# Altium PCB PCB_wordclocksmall_2023-02-03.pcbdoc (part 3 of 4)
Units mm, origin at the board's own origin, x right, y up, seen from the top; angles counter-clockwise.
Board outline 275.21 x 268.14 mm, 2 copper layers (Top Layer, Bottom Layer); 355 components, 229 nets, 1166 pads, 399 vias.
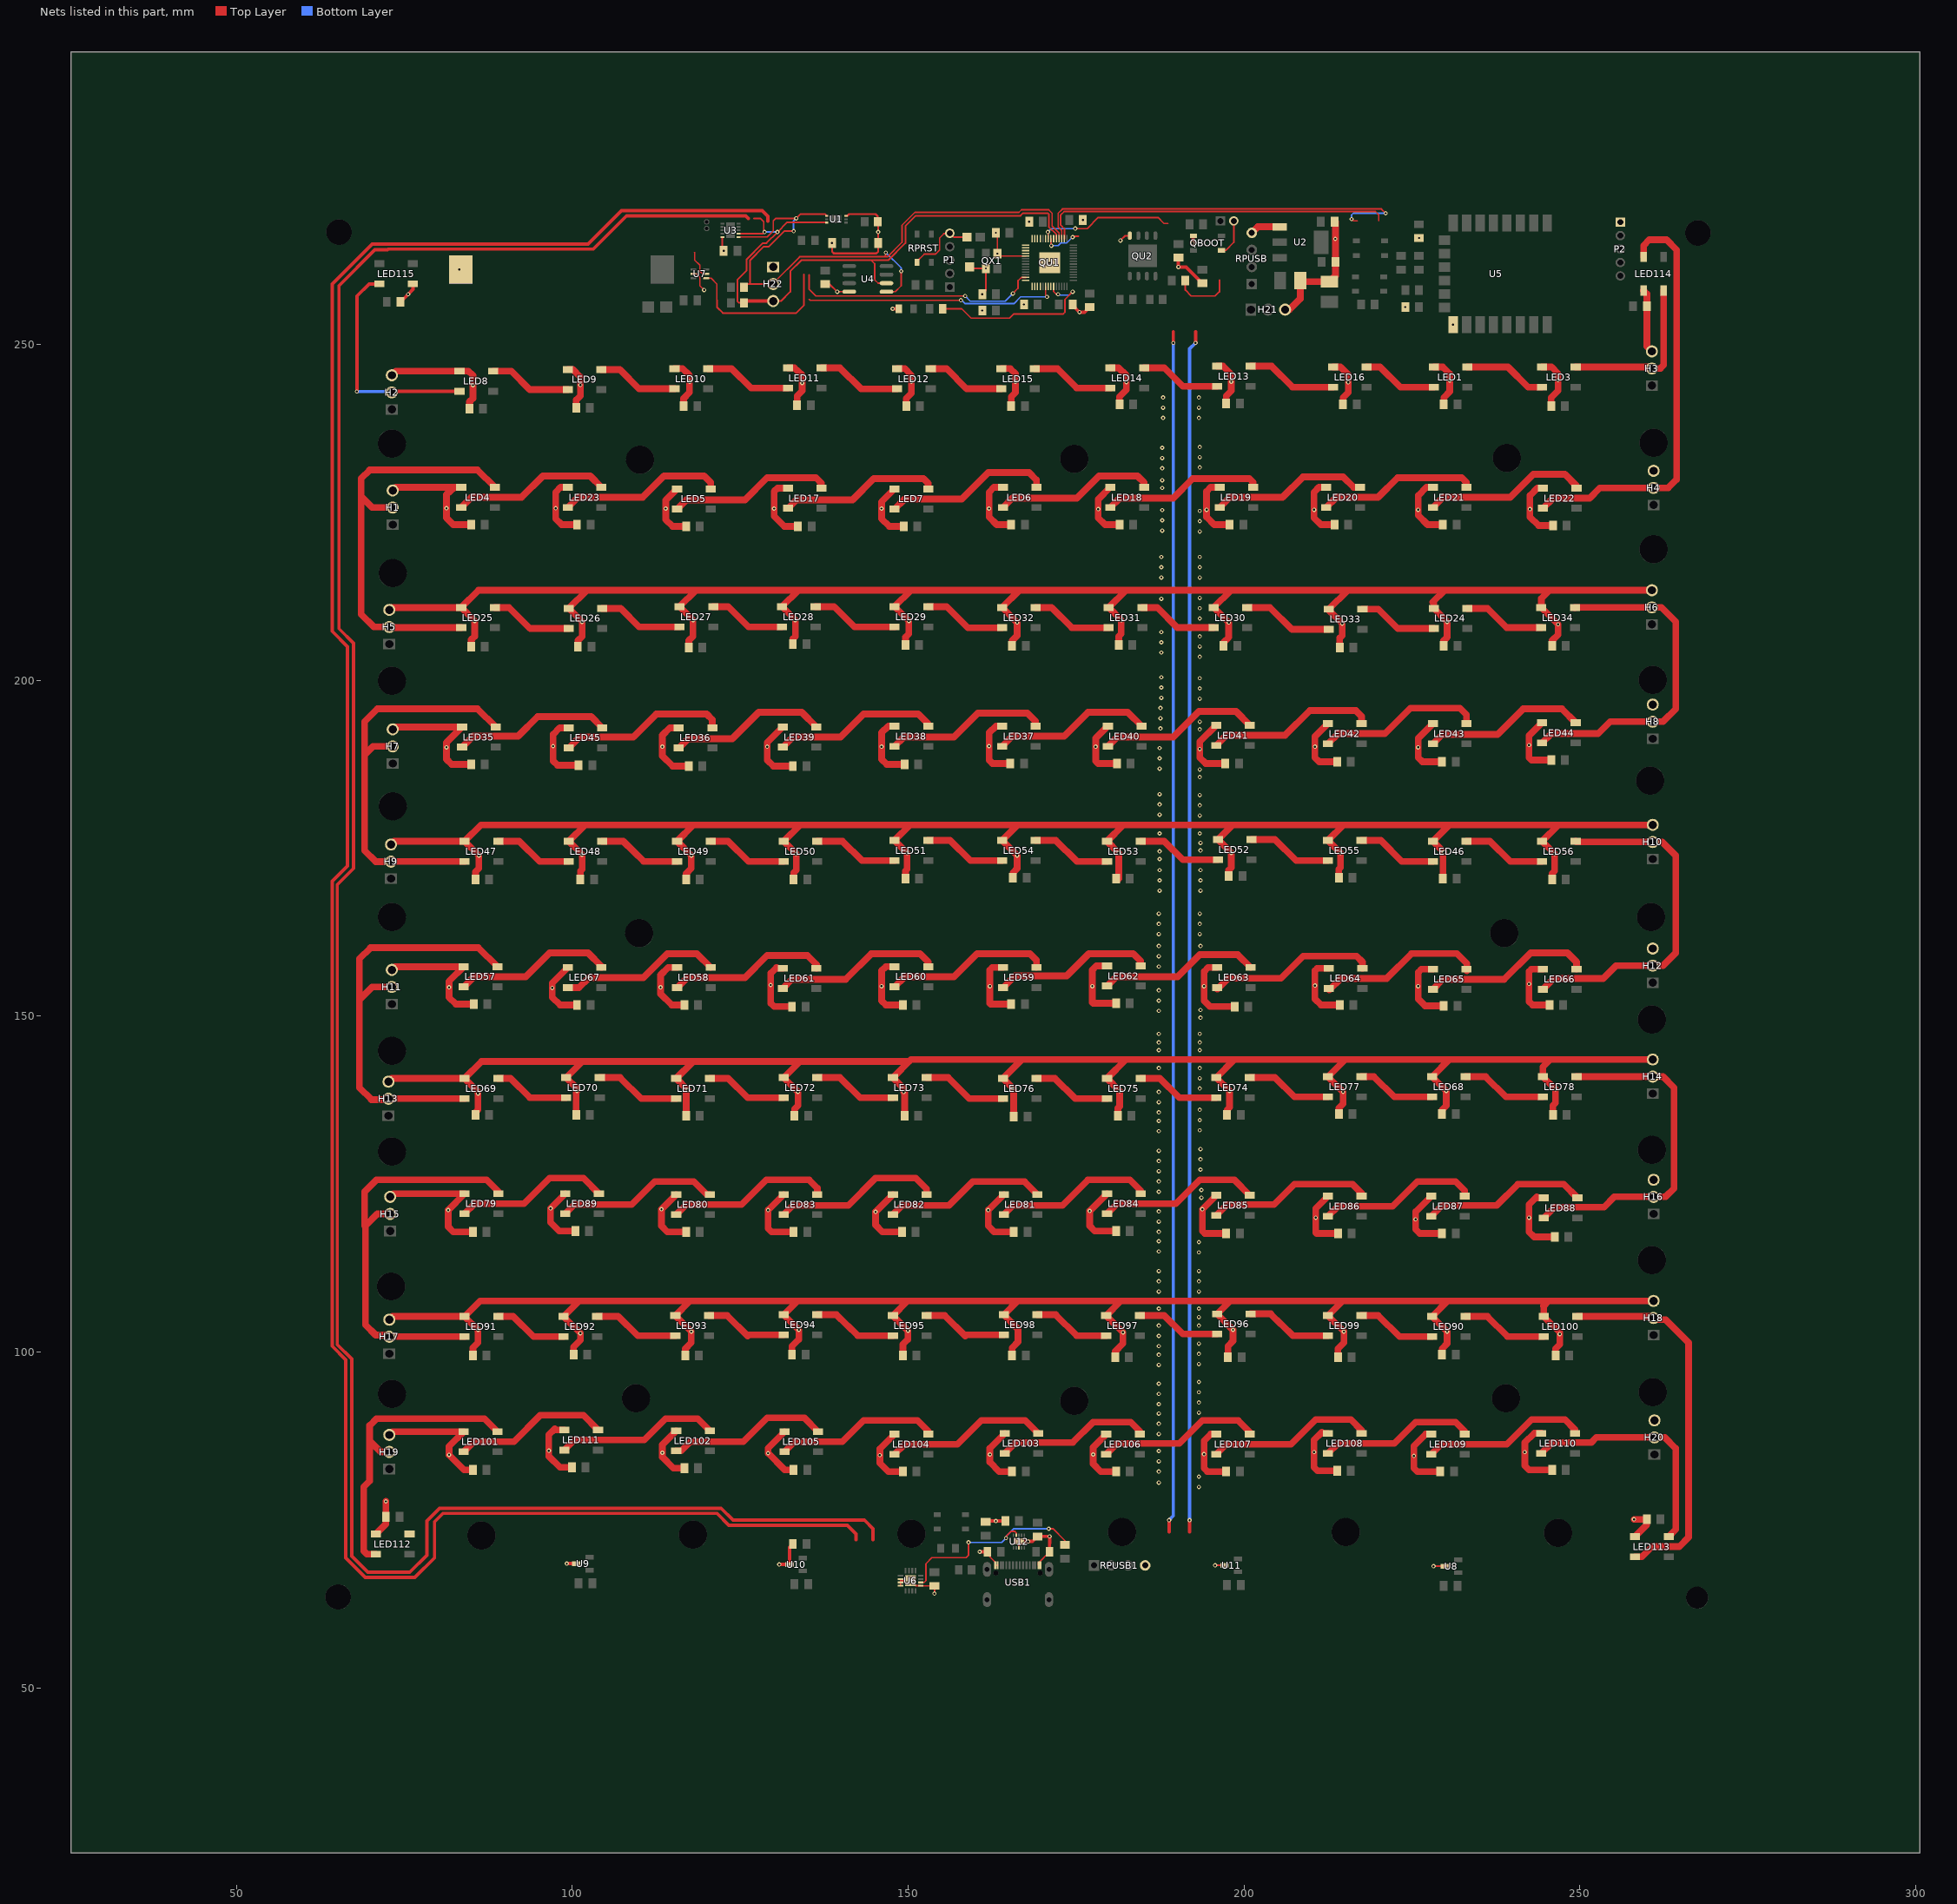
[diagram p3: the nets of this part, all layers, seen from the top]

## Via types
v1: diameter 0.635, hole 0.305, Top Layer to Bottom Layer, tented both sides, 361 vias
v2: diameter 0.61, hole 0.305, Top Layer to Bottom Layer, tented both sides, 37 vias
v3: diameter 1, hole 0.5, Top Layer to Bottom Layer, tented both sides, 1 vias

## Nets (pads, with @x,y where several pads share a name; then routed paths per layer and width w, separated by ;. In a path a pad name is that pad's centre, name@x,y a point inside that pad or via, vN(x,y) a via of type N, cw(c..) or ccw(c..) an arc to the next point about the centre after c; other vN are vias at no path point) (continued)
GND: BT1.2 BT2.2 C1.2 C2.1 C3.2 C4.2 C5.2 C6.1 C7.2 C8.2 C9.2 C10.1 C11.2 C12.2 C13.2 C14.2 C15.2 C16.2 C17.2 C18.2 C19.2 C20.2 C21.2 C22.2 C23.2 C24.2 C25.2 C26.2 C27.2 C28.2 C29.2 C30.2 C31.2 C32.2 C33.2 C34.2 C35.2 C36.2 C37.2 C38.2 C39.2 C40.2 C41.2 C42.2 C43.2 C44.2 C45.2 C46.2 C47.2 C48.2 C49.2 C50.2 C51.2 C52.2 C53.2 C54.2 C55.2 C56.2 C57.2 C58.2 C59.2 C60.2 C61.2 C62.2 C63.2 C64.2 C65.2 C66.2 C67.2 C68.2 C69.2 C70.2 C71.2 C72.2 C73.2 C74.2 C75.2 C76.2 C77.2 C78.2 C79.2 C80.2 C81.2 C82.2 C83.2 C84.2 C85.2 C86.2 C87.2 C88.2 C89.2 C90.2 C91.2 C92.2 C93.2 C94.2 C95.2 C96.2 C97.2 C98.2 C99.2 C100.2 C101.2 C102.2 C103.2 C104.2 C105.2 C106.2 C107.2 C108.2 C109.2 C110.2 C111.2 C112.2 C113.2 C114.2 C115.2 C116.2 C117.2 C118.2 C119.2 C120.2 C121.2 C122.2 C123.2 C124.2 C125.1 C126.1 C127.1 C128.1 C129.2 C130.2 C131.1 C132.1 C133.1 C134.2 C135.1 C136.2 C137.2 C138.2 C139.1 H1.3 H2.3 H3.3 H4.3 H5.3 H6.3 H7.3 H8.3 H9.3 H10.3 H11.3 H12.3 H13.3 H14.3 H15.3 H16.3 H17.3 H18.3 H19.3 H20.3 H21.3 H22.1 LED1.3 LED3.3 LED4.3 LED5.3 LED6.3 LED7.3 LED8.3 LED9.3 LED10.3 LED11.3 LED12.3 LED13.3 LED14.3 LED15.3 LED16.3 LED17.3 LED18.3 LED19.3 LED20.3 LED21.3 LED22.3 LED23.3 LED24.3 LED25.3 LED26.3 LED27.3 LED28.3 LED29.3 LED30.3 LED31.3 LED32.3 LED33.3 LED34.3 LED35.3 LED36.3 LED37.3 LED38.3 LED39.3 LED40.3 LED41.3 LED42.3 LED43.3 LED44.3 LED45.3 LED46.3 LED47.3 LED48.3 LED49.3 LED50.3 LED51.3 LED52.3 LED53.3 LED54.3 LED55.3 LED56.3 LED57.3 LED58.3 LED59.3 LED60.3 LED61.3 LED62.3 LED63.3 LED64.3 LED65.3 LED66.3 LED67.3 LED68.3 LED69.3 LED70.3 LED71.3 LED72.3 LED73.3 LED74.3 LED75.3 LED76.3 LED77.3 LED78.3 LED79.3 LED80.3 LED81.3 LED82.3 LED83.3 LED84.3 LED85.3 LED86.3 LED87.3 LED88.3 LED89.3 LED90.3 LED91.3 LED92.3 LED93.3 LED94.3 LED95.3 LED96.3 LED97.3 LED98.3 LED99.3 LED100.3 LED101.3 LED102.3 LED103.3 LED104.3 LED105.3 LED106.3 LED107.3 LED108.3 LED109.3 LED110.3 LED111.3 LED112.3 LED113.3 LED114.3 LED115.3 LED116.1 P1.5 P2.1 QBOOT.4 QU1.19 QU1.57 QU2.4 QX1.2 QX1.4 R1.2 R16.1 R17.1 R19.1 R23.1 RPRST.4 RPUSB1.4 RPUSB.4 U1.3 U2.1 U3.5 U4.4 U5.9 U6.2 U6.3 U6.4 U6.9 U6.17 U7.2 U8.3 U9.3 U10.3 U11.3 U12.8 U12.11 USB1.A1 USB1.A12 USB1.B1 USB1.B12 | length 2030.9
  Top Layer w0.229: U7.2@118.054,260.522 118.491,260.522 118.999,260.014 118.999,258.744 v1(119.634,258.109) ; v1(139.446,257.855) U4.4@141.245,257.855 ; U6.4@148.868,65.209 U6.3@148.868,65.709 U6.2@148.868,66.207 ; RPRST.4@151.325,262.232 151.325,262.368 152.4,263.443 154.051,263.443 154.686,264.078 154.686,265.856 155.321,266.491 156.147,266.491 P1.5@156.21,266.554 ; v1(161.036,257.474) 161.583,258.021 v1(161.583,261.327) ; R17.1@161.814,70.276 161.813,69.88 162.97,68.723 USB1.A1@162.97,68.257 USB1.B12@163.32,68.257 ; v1(163.068,266.618) 163.283,266.403 v1(163.283,263.527) 163.637,263.173 QU1.19@167.519,263.173 ; U12.8@166.497,70.872 U12.11@166.497,71.8 ; USB1.A12@169.72,68.257 USB1.B1@169.42,68.257 169.42,68.643 R19.1@171.053,70.276
  Top Layer w0.254: U3.5@122.354,265.999 122.354,264.152 v2(122.555,263.951) ; C136.2@137.668,258.998 138.303,258.998 v1(139.446,257.855) ; U6.3@148.868,65.709 149.117,65.958 U6.17@150.368,65.958 151.117,65.209 U6.9@151.868,65.209 ; U6.9@151.868,65.209 C139.1@153.924,65.196 v1(153.924,64.053) ; P1.5@156.21,266.554 156.781,265.983 C135.1@158.766,265.983 ; C134.2@159.131,261.554 159.358,261.327 v1(161.583,261.327) ; v1(181.61,265.475) 182.336,266.201 QU2.4@183.007,266.202 ; v1(195.707,68.244) U11.3@197.12,68.244 ; v1(228.219,68.117) U8.3@229.886,68.117
  Top Layer w0.3: v1(138.684,265.094) 138.684,263.824 138.938,263.57 145.288,263.57 145.542,263.824 C7.2@145.542,265.094 v1(145.542,266.745) 145.542,268.219 R1.2@145.492,268.269 ; U1.3@140.746,269.15 140.962,269.15 141.224,269.412 145.161,269.412 145.491,269.082 R1.2@145.492,268.269
  Top Layer w0.508: C122.2@74.422,256.331 v1(75.57,257.479) 76.287,258.196 LED115.3@76.287,259.022 ; v1(99.187,68.498) U9.3@100.6,68.498 ; v1(130.821,68.381) U10.3@132.35,68.371 ; U10.3@132.35,68.371 132.35,70.927 C4.2@132.842,71.419 ; v1(147.701,255.315) LED116.1@148.633,255.315 ; v1(160.655,70.276) R17.1@161.814,70.276 ; C137.2@161.544,74.721 161.671,74.848 v1(163.068,74.848) R23.1@164.465,74.848 ; U12.11@166.497,71.8 v1(167.876,71.8) 168.529,71.8 C138.2@169.291,72.562 v1(171.069,72.562) R19.1@171.053,70.276 ; C133.1@174.498,255.95 174.498,255.823 v1(175.514,254.807) 176.276,254.807 C124.2@177.038,255.569 ; C129.2@190.246,262.935 v1(190.246,261.538) 191.389,261.538 C131.1@193.802,259.125 ; v2(192.405,265.094) 192.405,266.11 QBOOT.4@192.464,266.169
  Top Layer w0.991: H2.3@73.152,245.409 73.763,246.02 LED8.3@83.225,246.02 ; LED8.3@83.226,246.021 84.557,246.021 85.217,245.409 v1(85.217,243.942) 85.217,241.98 84.709,241.472 C16.2@84.709,240.456 ; LED9.3@99.355,246.275 100.099,246.275 101.219,245.155 v1(101.219,243.968) 101.219,242.361 100.584,241.726 C17.2@100.584,240.583 ; LED10.3@115.23,246.402 116.434,246.402 117.475,245.409 v1(117.475,244.425) 117.475,242.869 116.586,241.98 C18.2@116.586,240.837 ; LED11.3@132.121,246.529 133.071,246.529 134.239,245.409 v1(134.239,244.247) 134.239,243.123 133.477,242.361 C19.2@133.477,240.964 ; LED12.3@148.376,246.401 149.503,246.401 150.495,245.409 v1(150.495,244.476) 150.495,242.742 149.733,241.98 C20.2@149.733,240.837 ; LED15.3@163.871,246.402 165.202,246.402 165.989,245.663 v1(165.989,244.45) 165.989,242.869 165.354,242.234 C23.2@165.354,240.837 ; LED14.3@180.127,246.529 181.331,246.529 182.499,245.409 v1(182.499,244.4) 182.499,243.25 181.483,242.234 C22.2@181.483,241.091 ; LED13.3@196.001,246.782 196.874,246.782 198.12,245.536 v1(198.12,244.45) 198.12,243.123 197.358,242.361 C21.2@197.358,241.218 ; LED16.3@213.274,246.656 214.351,246.656 215.519,245.536 v1(215.519,244.374) 215.519,242.869 214.757,242.107 C5.2@214.757,241.091 ; LED1.3@228.26,246.656 229.591,246.656 230.632,245.663 v1(230.632,244.654) 230.632,242.996 229.743,242.107 C11.2@229.743,241.091 ; LED3.3@244.388,246.655 245.769,246.655 246.761,245.663 v1(246.761,244.704) 246.761,243.123 245.745,242.107 C1.2@245.745,240.837
  Top Layer w1: LED112.3@70.779,72.919 72.263,74.403 C119.2@72.263,75.483 v1(72.263,77.769) ; H13.3@72.644,140.253 73.128,140.737 LED69.3@83.987,140.737 ; H19.3@72.771,87.675 73.255,88.159 LED101.3@83.86,88.159 81.661,85.96 v1(81.661,84.701) 83.894,82.468 C108.2@85.217,82.468 ; H17.3@72.771,104.82 73.255,105.304 LED91.3@83.987,105.304 ; H5.3@72.771,210.484 73.128,210.841 LED25.3@83.479,210.841 ; H15.3@72.898,123.108 73.382,123.592 LED79.3@83.987,123.592 v1(81.534,121.139) 81.534,118.663 82.296,117.901 C86.2@85.217,117.901 ; H9.3@73.025,175.559 73.509,176.043 LED47.3@83.987,176.043 ; H11.3@73.152,156.89 73.636,157.374 LED57.3@83.86,157.374 81.661,155.175 v1(81.661,154.301) 81.661,152.826 82.677,151.81 C64.2@85.344,151.81 ; H7.3@73.279,192.704 73.636,193.061 LED35.3@83.606,193.061 81.28,190.735 v1(81.28,190.031) 81.28,188.259 82.042,187.497 C42.2@84.963,187.497 ; H1.3@73.279,228.264 73.763,228.748 LED4.3@83.479,228.748 ; v1(81.28,225.616) 81.28,224.2 82.296,223.184 C12.2@84.963,223.184 ; v1(81.28,225.616) 81.28,227.629 82.448,228.749 LED4.3@83.48,228.749 ; C32.2@84.963,205.023 84.963,206.039 85.471,206.547 v1(85.471,208.849) LED25.3@83.479,210.841 ; C98.2@85.217,99.486 85.217,100.629 85.979,101.391 v1(85.979,103.312) LED91.3@83.987,105.304 ; C76.2@85.598,135.3 85.598,135.681 85.979,136.062 v1(85.979,138.491) 85.979,138.745 LED69.3@83.987,140.737 ; C54.2@85.598,170.352 85.598,171.495 86.106,172.003 v1(86.106,173.924) LED47.3@83.987,176.043 ; v1(97.536,225.616) 97.536,224.073 98.425,223.184 C30.2@100.711,223.184 ; v1(97.536,225.616) 97.536,228.01 98.274,228.748 LED23.3@99.354,228.748 ; LED111.3@98.846,88.413 97.56,88.413 97.409,88.564 96.52,87.675 v1(96.52,85.311) 96.52,84.5 98.171,82.849 C118.2@99.949,82.849 ; LED89.3@98.973,123.592 v1(96.774,121.393) 96.774,119.298 98.044,118.028 C96.2@100.457,118.028 ; LED67.3@99.354,157.247 97.028,154.921 v1(97.028,154.217) 97.028,152.826 98.171,151.683 C74.2@100.711,151.683 ; LED45.3@99.481,192.934 98.147,192.934 97.155,191.942 v1(97.155,190.2) 97.155,188.005 97.79,187.37 C52.2@100.965,187.37 ; C99.2@100.203,99.613 100.203,100.756 101.219,101.772 v1(101.219,102.804) LED92.3@98.719,105.304 101.029,107.614 ; C77.2@100.584,135.3 100.584,138.745 v1(100.711,138.872) 100.711,139.253 LED70.3@99.1,140.864 101.489,143.252 117.998,143.252 ; C33.2@100.838,205.023 100.838,205.912 101.473,206.547 v1(101.473,208.722) LED26.3@99.481,210.714 102.172,213.405 ; C55.2@101.219,170.352 101.219,171.622 101.473,171.876 v1(101.473,174.051) LED48.3@99.481,176.043 101.918,178.48 ; 101.869,143.252 86.503,143.252 LED69.3@83.987,140.737 ; v1(113.919,225.565) 113.919,223.946 114.935,222.93 C13.2@116.967,222.93 ; v1(113.919,225.565) 113.919,226.803 LED5.3@115.61,228.494 ; LED102.3@115.483,88.286 113.411,86.214 v1(113.411,85.006) 113.411,84.373 115.062,82.722 C109.2@116.713,82.722 ; LED80.3@115.483,123.465 v1(113.284,121.266) 113.284,118.79 114.173,117.901 C87.2@116.967,117.901 ; LED58.3@115.61,157.247 114.276,157.247 113.157,156.128 v1(113.157,154.301) 113.157,153.334 114.808,151.683 C65.2@116.713,151.683 ; LED36.3@115.864,192.934 114.53,192.934 113.411,191.815 v1(113.411,190.115) 113.411,188.767 114.935,187.243 C43.2@117.348,187.243 ; C100.2@116.84,99.486 116.84,100.502 117.729,101.391 v1(117.729,103.058) LED93.3@115.356,105.431 117.539,107.614 ; C78.2@116.967,135.173 116.967,138.745 v1(117.221,138.999) LED71.3@115.483,140.737 117.999,143.252 ; C56.2@116.967,170.352 116.967,171.241 117.729,172.003 v1(117.729,173.924) LED49.3@115.61,176.043 118.047,178.48 ; C34.2@117.348,204.896 117.348,205.912 117.983,206.547 v1(117.983,208.976) LED27.3@115.991,210.968 118.428,213.405 ; v1(129.159,84.955) 131.646,82.468 C110.2@132.969,82.468 ; v1(129.159,84.955) 129.159,85.706 LED105.3@131.612,88.159 ; v1(130.048,225.565) 130.048,224.454 131.572,222.93 C14.2@133.604,222.93 ; v1(130.048,225.565) 130.048,228.137 130.581,228.622 LED17.3@132.121,228.622 ; LED61.3@131.358,157.12 130.58,157.12 130.429,157.271 129.54,156.382 v1(129.54,154.64) 129.54,151.937 130.048,151.429 C66.2@132.715,151.429 ; LED39.3@131.358,193.061 129.032,190.735 v1(129.032,190.115) 129.032,188.132 129.921,187.243 C44.2@132.842,187.243 ; LED83.3@131.485,123.465 v1(129.159,121.139) 129.159,118.409 129.667,117.901 C88.2@132.969,117.901 ; C101.2@132.715,99.613 132.715,100.883 133.731,101.899 v1(133.731,103.312) LED94.3@131.485,105.558 133.541,107.614 ; C35.2@132.842,205.404 132.842,206.166 133.223,206.547 v1(133.223,208.976) LED28.3@131.231,210.968 133.668,213.405 ; C57.2@132.969,170.352 132.969,171.368 133.35,171.749 v1(133.35,174.178) LED50.3@131.485,176.043 133.922,178.48 ; C79.2@133.096,135.173 133.096,136.189 133.604,136.697 v1(133.604,138.745) LED72.3@131.485,140.864 133.874,143.252 ; v1(146.05,225.565) 146.05,224.073 147.193,222.93 C15.2@149.352,222.93 ; v1(146.05,225.565) 146.05,226.549 LED7.3@147.995,228.494 ; LED82.3@147.741,123.465 v1(145.161,120.885) 145.161,118.917 146.177,117.901 C89.2@149.098,117.901 ; LED104.3@147.995,87.778 145.796,85.579 v1(145.796,84.65) 145.796,83.484 147.066,82.214 C111.2@149.225,82.214 ; LED60.3@147.996,157.375 146.71,157.375 146.05,156.763 v1(146.05,154.471) 146.05,152.318 146.685,151.683 C67.2@149.225,151.683 ; LED38.3@147.996,193.189 147.091,193.189 146.05,192.196 v1(146.05,190.115) 146.05,188.259 146.812,187.497 C45.2@149.479,187.497 ; C102.2@149.225,99.486 149.225,101.137 149.987,101.899 v1(149.987,103.185) LED95.3@147.741,105.431 149.924,107.614 ; C80.2@149.479,135.173 149.479,138.596 v1(149.352,138.723) 149.352,139.253 LED73.3@147.741,140.864 150.432,143.555 166.942,143.555 ; C58.2@149.606,170.479 149.606,171.622 149.86,171.876 v1(149.86,174.305) LED51.3@147.995,176.17 150.305,178.48 ; C36.2@149.606,205.277 149.606,206.42 150.114,206.928 v1(150.114,208.849) LED29.3@147.995,210.968 150.432,213.405 ; 150.13,143.252 133.874,143.252 ; LED37.3@163.998,193.189 163.093,193.189 162.052,192.196 v1(162.052,190.2) 162.052,188.132 162.56,187.624 C46.2@165.227,187.624 ; LED59.3@164.124,157.247 162.536,157.247 162.179,156.89 v1(162.179,154.471) 162.179,151.937 162.306,151.81 C68.2@165.354,151.81 ; LED6.3@164.124,228.748 162.79,228.748 162.052,228.01 v1(162.052,225.565) 162.052,224.327 163.195,223.184 C24.2@165.354,223.184 ; LED81.3@164.251,123.465 v1(161.925,121.139) 161.925,118.79 162.814,117.901 C90.2@165.735,117.901 ; LED103.3@164.378,87.905 162.179,85.706 v1(162.179,84.752) 162.179,83.611 163.576,82.214 C112.2@165.481,82.214 ; C103.2@165.481,99.486 165.481,100.629 166.37,101.518 166.37,103.439 LED98.3@164.251,105.558 166.307,107.614 ; C37.2@165.481,205.15 165.481,205.912 166.243,206.674 v1(166.243,208.595) LED32.3@163.997,210.841 166.561,213.405 ; C59.2@165.608,170.606 165.608,171.368 166.243,172.003 v1(166.243,173.924) LED54.3@163.997,176.17 166.307,178.48 ; C81.2@165.735,135.046 165.735,139.126 v1(165.608,139.253) LED76.3@164.124,140.737 166.942,143.555 ; LED106.3@179.491,87.778 177.546,85.833 v1(177.546,84.752) 177.546,83.357 178.689,82.214 C113.2@180.975,82.214 ; LED84.3@179.618,123.592 v1(177.038,121.012) 177.038,118.79 177.8,118.028 C91.2@180.975,118.028 ; LED62.3@179.618,157.501 178.03,157.501 177.419,156.89 v1(177.419,154.471) 177.419,152.064 177.546,151.937 C69.2@180.975,151.937 ; LED40.3@179.745,193.188 177.927,191.37 v1(177.927,190.115) 177.927,188.005 178.308,187.624 C47.2@181.102,187.624 ; LED18.3@180.126,228.748 178.308,226.93 v1(178.308,225.48) 178.308,224.2 179.324,223.184 C25.2@181.483,223.184 ; C104.2@180.848,99.232 180.848,100.121 181.991,101.264 v1(181.991,102.931) LED97.3@179.491,105.431 181.674,107.614 ; C60.2@180.975,170.479 181.356,170.479 v1(181.356,174.305) ; C82.2@181.229,135.173 181.229,136.316 181.483,136.57 v1(181.483,138.872) LED75.3@179.618,140.737 182.436,143.555 ; v1(181.356,174.305) LED53.3@179.618,176.043 182.055,178.48 ; C38.2@181.356,205.277 181.356,206.547 181.737,206.928 v1(181.737,208.976) LED31.3@179.872,210.841 182.436,213.405 ; LED107.3@195.874,87.778 195.048,87.778 194.056,86.786 v1(194.056,84.803) 194.056,82.722 194.564,82.214 C114.2@197.358,82.214 ; LED85.3@195.874,123.338 v1(193.802,121.266) 193.802,118.028 194.183,117.647 C92.2@197.358,117.647 ; LED41.3@195.874,193.315 193.421,190.862 v1(193.421,189.777) 193.421,188.513 194.31,187.624 C48.2@197.231,187.624 ; LED63.3@196.001,157.247 194.667,157.247 194.056,156.636 v1(194.056,154.471) 194.056,152.318 194.945,151.429 C70.2@198.628,151.429 ; LED19.3@196.382,228.748 195.048,228.748 194.437,228.137 v1(194.437,225.396) 194.437,224.327 195.58,223.184 C26.2@197.866,223.184 ; C39.2@196.977,205.15 196.977,205.658 197.739,206.42 v1(197.739,208.595) LED30.3@195.493,210.841 198.057,213.405 ; C83.2@197.485,135.3 197.485,136.062 197.866,136.443 v1(197.866,138.872) LED74.3@195.874,140.864 198.565,143.555 ; C105.2@197.612,99.232 197.612,100.883 198.374,101.645 v1(198.374,103.312) LED96.3@196.001,105.685 197.93,107.614 215.116,107.614 ; C61.2@197.739,170.86 197.739,171.749 198.12,172.13 v1(198.12,174.305) LED52.3@196.128,176.297 198.311,178.48 ; 198.453,107.614 181.674,107.614 ; v1(210.439,85.108) 210.439,82.849 210.947,82.341 C115.2@213.868,82.341 ; v1(210.439,85.108) 210.439,86.913 211.582,88.056 211.733,87.905 LED108.3@212.511,87.905 ; LED20.3@212.257,228.748 211.177,228.748 210.439,228.01 v1(210.439,225.396) 210.439,224.2 211.455,223.184 C27.2@213.487,223.184 ; LED86.3@212.511,123.211 210.693,121.393 v1(210.693,120.011) 210.693,117.774 210.82,117.647 C93.2@213.995,117.647 ; LED42.3@212.511,193.569 210.566,191.624 v1(210.566,190.115) 210.566,188.513 211.201,187.878 C49.2@213.868,187.878 ; LED64.3@212.638,157.12 210.923,157.12 210.566,156.763 v1(210.566,154.555) 210.566,152.572 211.455,151.683 C71.2@214.249,151.683 ; C106.2@213.995,99.232 213.995,100.502 214.884,101.391 v1(214.884,103.058) LED99.3@212.511,105.431 214.694,107.614 230.315,107.614 ; C84.2@214.122,135.427 214.122,136.316 214.757,136.951 v1(214.757,138.745) LED77.3@212.511,140.991 215.075,143.555 230.569,143.555 ; C62.2@214.122,170.606 214.122,171.876 214.376,172.13 v1(214.376,174.305) LED55.3@212.511,176.17 214.821,178.48 ; C40.2@214.249,204.896 214.249,206.293 214.63,206.674 v1(214.63,208.452) 212.638,210.444 LED33.3@212.638,210.587 215.456,213.405 ; 215.533,143.555 198.565,143.555 ; LED109.3@227.878,87.778 227.052,87.778 225.298,86.024 v1(225.298,84.549) 225.298,82.722 225.806,82.214 C116.2@229.235,82.214 ; LED87.3@227.878,123.211 225.552,120.885 v1(225.552,119.757) 225.552,118.282 226.187,117.647 C94.2@229.489,117.647 ; LED65.3@228.132,156.993 226.417,156.993 225.933,156.509 v1(225.933,154.471) 225.933,152.572 226.949,151.556 C72.2@229.743,151.556 ; LED43.3@228.132,193.569 225.933,191.37 v1(225.933,190.031) 225.933,188.513 226.568,187.878 C50.2@229.489,187.878 ; LED21.3@228.132,228.748 227.179,228.748 225.933,227.502 v1(225.933,225.396) 225.933,224.581 227.33,223.184 C28.2@229.616,223.184 ; C97.2@229.489,99.613 229.489,100.502 230.251,101.264 v1(230.251,103.058) LED90.3@228.005,105.304 230.315,107.614 ; C75.2@229.489,135.427 229.489,136.062 230.124,136.697 v1(230.124,138.872) LED68.3@228.005,140.991 230.569,143.555 ; C53.2@229.616,170.479 229.616,174.305 v1(229.743,174.432) LED46.3@228.132,176.043 230.569,178.48 ; C31.2@229.743,205.15 229.743,205.912 230.251,206.42 v1(230.251,208.722) LED24.3@228.259,210.714 228.259,211.46 228.092,211.627 229.87,213.405 ; v1(242.57,225.48) 242.57,224.327 243.84,223.057 C29.2@245.999,223.057 ; v1(242.57,225.48) 242.57,227.502 243.689,228.621 LED22.3@244.515,228.621 ; LED110.3@244.262,87.906 243.23,87.906 241.808,86.532 v1(241.808,85.108) 241.808,83.103 242.443,82.468 C117.2@245.872,82.468 ; LED44.3@244.388,193.696 242.443,191.751 v1(242.443,190.369) 242.443,188.513 242.824,188.132 C51.2@245.745,188.132 ; LED66.3@244.515,156.993 242.8,156.993 242.443,156.636 v1(242.443,154.809) 242.443,152.191 242.951,151.683 C73.2@245.491,151.683 ; LED88.3@244.642,122.957 243.737,122.957 243.586,123.108 242.443,121.965 v1(242.443,120.011) 242.443,117.901 243.205,117.139 C95.2@246.253,117.139 ; C63.2@245.872,170.352 245.872,171.241 246.253,171.622 v1(246.253,174.178) LED56.3@244.388,176.043 246.825,178.48 ; C41.2@245.872,205.15 245.872,205.912 246.761,206.801 v1(246.761,208.341) LED34.3@244.261,210.841 244.261,212.175 245.491,213.405 ; C85.2@245.999,135.3 245.999,136.697 246.38,137.078 v1(246.38,139.126) LED78.3@244.515,140.991 244.515,142.452 245.618,143.555 ; C107.2@246.38,99.486 246.38,100.502 247.015,101.137 v1(247.015,102.677) 247.015,102.931 LED100.3@244.642,105.304 244.642,106.812 244.602,106.852 245.364,107.614 ; v1(258.064,75.102) C120.2@259.969,75.102 259.969,74.276 LED113.3@258.231,72.538 ; H6.3@260.731,213.405 245.491,213.405 ; H14.3@260.858,143.555 245.618,143.555 ; H10.3@260.858,178.48 246.825,178.48 ; H18.3@260.985,107.614 245.364,107.614 ; LED25.3@83.479,210.841 86.043,213.405 102.172,213.405 ; LED91.3@83.987,105.304 86.297,107.614 101.029,107.614 ; LED47.3@83.987,176.043 86.424,178.48 101.918,178.48 ; 101.029,107.614 117.539,107.614 ; 101.918,178.48 118.047,178.48 ; 102.172,213.405 118.428,213.405 ; 117.539,107.614 133.541,107.614 ; 117.999,143.252 133.874,143.252 ; 118.047,178.48 133.922,178.48 ; 118.428,213.405 133.668,213.405 ; 133.541,107.614 149.924,107.614 ; 133.668,213.405 150.432,213.405 ; 133.922,178.48 150.305,178.48 ; 149.924,107.614 166.307,107.614 ; 150.305,178.48 166.307,178.48 ; 150.432,213.405 166.561,213.405 ; 166.307,107.614 181.674,107.614 ; 166.307,178.48 182.055,178.48 ; 166.561,213.405 182.436,213.405 ; 166.942,143.555 182.436,143.555 ; 182.055,178.48 198.311,178.48 ; 182.436,143.555 198.565,143.555 ; 182.436,213.405 198.057,213.405 ; 198.057,213.405 215.456,213.405 ; 198.311,178.48 214.821,178.48 ; 214.821,178.48 230.569,178.48 ; 215.456,213.405 229.87,213.405 ; 229.87,213.405 245.491,213.405 ; 230.315,107.614 245.364,107.614 ; 230.569,143.555 245.618,143.555 ; 230.569,178.48 246.825,178.48
  Top Layer w1.016: RPUSB.4@201.168,266.618 202.07,267.52 U2.1@205.308,267.52 ; H21.3@206.121,255.188 206.756,255.188 208.384,256.816 C8.2@208.384,259.506 208.534,259.356 C9.2@212.725,259.356 213.614,260.245 C2.1@213.614,262.3 v2(213.614,265.729) 213.614,268.269 C10.1@213.487,268.269 ; LED114.3@259.485,258.022 259.969,257.538 C121.2@259.969,255.696 259.969,249.727 H3.3@260.731,248.965
  other v1: 193.294,79.928 187.325,80.563 193.294,81.452 187.325,82.214 187.325,83.738 187.325,85.262 187.325,87.802 187.325,89.326 187.325,90.85 193.294,90.977 187.325,92.247 193.294,92.501 187.325,93.771 193.294,94.025 187.325,95.295 193.294,95.549 187.325,98.089 193.294,98.216 187.325,99.613 193.294,99.74 187.325,100.883 193.294,101.264 187.325,102.407 187.325,103.931 193.294,103.931 193.294,105.201 187.325,106.471 193.294,106.471 187.325,109.011 193.294,109.011 187.325,110.535 193.294,110.535 187.325,112.059 193.294,112.059 193.294,114.853 187.325,114.98 193.294,116.377 187.325,116.504 187.325,117.901 187.325,119.425 187.325,120.949 193.675,122.981 187.325,123.87 193.675,124.124 187.325,125.394 187.325,126.918 193.548,127.172 187.325,128.442 193.548,128.696 187.325,129.966 193.548,130.22 187.325,132.887 193.421,133.014 187.325,134.411 193.421,134.538 187.325,135.681 193.421,136.062 187.325,137.205 187.325,138.729 193.421,139.237 193.421,140.761 187.325,142.285 193.421,142.285 187.325,144.952 193.421,144.952 187.325,146.095 193.421,146.095 187.325,147.365 193.421,147.365 193.548,149.778 187.325,150.794 193.548,150.921 187.325,152.318 187.325,153.842 187.325,157.398 187.325,158.922 187.325,160.446 193.548,160.446 187.325,162.224 193.421,162.224 187.325,163.748 193.421,163.748 187.325,165.272 193.421,165.272 187.452,168.701 193.548,168.701 187.452,170.225 193.548,170.225 187.452,171.749 193.548,171.749 187.452,173.4 187.452,174.543 193.548,174.67 193.548,175.813 187.452,177.21 193.421,177.21 193.421,179.877 187.452,180.004 193.421,181.401 187.452,181.528 193.421,182.925 187.452,183.052 193.421,185.592 193.421,186.735 187.452,186.862 187.452,188.386 187.452,189.91 193.421,192.704 187.579,192.831 193.421,193.847 187.579,194.355 187.579,195.879 193.421,197.276 187.706,197.403 193.421,198.8 187.706,198.927 193.421,200.324 187.706,200.451 193.421,203.499 187.706,204.134 193.421,205.023 187.706,205.658 193.421,206.547 187.706,207.182 193.421,209.214 193.421,210.738 187.706,212.135 193.421,212.262 187.706,215.31 193.421,215.31 187.706,216.834 193.421,216.834 187.706,218.358 193.421,218.358 193.421,222.168 187.833,222.295 193.421,223.692 187.833,223.819 193.421,225.216 187.833,225.343 187.833,228.645 187.833,229.788 187.833,231.566 193.421,231.693 187.833,233.09 193.421,233.217 187.833,234.614 193.421,234.741 187.96,239.059 193.294,239.059 187.96,240.583 193.294,240.583 187.96,242.107 193.294,242.107 161.036,255.061 167.259,255.95 83.185,261.157 171.069,262.173 168.021,268.269 176.022,268.523
  other v2: 231.141,252.973 224.028,255.569 226.06,265.856
GPIO0: JP11.2 QU1.2 | length 52.5
  Top Layer w0.229: QU1.2@173.269,265.724 173.269,267.212 172.72,267.761 172.72,269.285 173.228,269.793 219.583,269.793 220.066,269.31 JP11.2@220.066,268.396
GPIO1: JP10.2 QU1.3 | length 60.1
  Top Layer w0.229: QU1.3@172.869,265.723 172.869,266.977 172.339,267.507 172.339,269.539 172.974,270.174 220.472,270.174 v2(221.107,269.539) ; v2(216.027,268.65) 216.281,268.396 JP10.2@216.891,268.396
  Bottom Layer w0.229: v2(216.027,268.65) 216.027,269.285 216.281,269.539 v2(221.107,269.539)
GPIO2: H22.2 JP12.2 QU1.4 R3.2 U1.4 U3.6 U4.5 | length 98.7
  Top Layer w0.229: U3.6@124.788,265.999 129.048,265.999 129.946,266.897 JP12.2@129.946,268.396 130.327,268.777 v1(133.35,268.777) ; H22.2@129.921,258.998 129.921,259.125 133.858,263.062 146.939,263.062 149.098,265.221 149.098,267.761 151.003,269.666 166.497,269.666 166.878,270.047 170.942,270.047 171.45,269.539 171.45,267.634 172.469,266.615 QU1.4@172.469,265.724 ; 146.443,263.062 146.685,263.304 v2(146.685,263.697) ; U4.5@146.791,257.855 148.082,257.855 148.971,258.744 v2(148.971,260.903)
  Top Layer w0.254: R3.2@125.553,258.49 126.061,258.998 H22.2@129.921,258.998 126.492,258.998 126.492,262.554 128.524,264.586 129.286,264.586 131.572,266.872 v1(132.969,266.872) ; v1(133.35,268.777) 133.985,269.412 137.63,269.412 U1.4@137.891,269.15
  Bottom Layer w0.229: v2(146.685,263.697) 148.971,261.411 v2(148.971,260.903)
  Bottom Layer w0.254: v1(132.969,266.872) 132.969,268.396 v1(133.35,268.777)
GPIO3: H22.3 JP13.2 QU1.5 R4.2 U1.6 U3.7 U4.6 | length 94.7
  Top Layer w0.229: JP13.2@127.025,268.777 128.016,268.777 128.524,268.269 128.524,266.872 v2(128.651,266.745) ; 144.499,262.554 145.034,262.019 145.034,259.633 145.542,259.125 U4.6@146.791,259.125
  Top Layer w0.254: U3.7@124.788,266.499 128.405,266.499 v2(128.651,266.745) ; R4.2@125.553,256.204 124.841,256.204 124.587,256.458 124.587,259.633 125.984,261.03 125.984,262.681 128.397,265.094 128.905,265.094 v2(130.556,266.745) 131.961,268.15 U1.6@137.891,268.15 ; H22.3@129.921,256.458 131.064,256.458 132.461,257.855 132.461,260.903 134.112,262.554 147.066,262.554 149.606,265.094 149.606,267.634 151.13,269.158 166.751,269.158 167.132,269.539 170.815,269.539 170.942,269.412 170.942,267.507 172.07,266.379 QU1.5@172.07,265.724
  Top Layer w0.5: R4.2@125.553,256.204 125.807,256.458 H22.3@129.921,256.458
  Bottom Layer w0.254: v2(128.651,266.745) v2(130.556,266.745)
GPIO4: QU1.6
GPIO5: JP14.2 QU1.7 | length 5.6
  Top Layer w0.229: QU1.7@171.269,265.723 171.269,264.767 v1(171.323,264.713) ; v1(174.498,265.983) 174.625,266.11 JP14.2@175.362,266.11
  Bottom Layer w0.229: v1(171.323,264.713) 172.339,264.713 172.72,265.094 173.609,265.094 v1(174.498,265.983)
GPIO6: JP15.2 QU1.8 | length 20.2
  Top Layer w0.229: v1(170.815,266.745) 170.869,266.691 QU1.8@170.869,265.723 ; v1(174.879,267.253) 176.657,267.253 178.308,268.904 187.198,268.904 188.087,268.015 JP15.2@188.697,268.015
  Bottom Layer w0.229: v1(170.815,266.745) 171.323,267.253 v1(174.879,267.253)
GPIO7: QU1.9
GPIO8: QU1.11
GPIO9: QU1.12
GPIO10: QU1.13
GPIO11: QU1.14
GPIO12: QU1.15
GPIO13: QU1.16
GPIO14: QU1.17
GPIO15: QU1.18
GPIO16: JP7.1 QU1.27 | length 37.3
  Top Layer w0.229: JP7.1@135.28,260.395 135.28,258.211 136.271,257.22 v1(158.496,257.22) ; v1(165.608,257.601) 166.37,258.363 166.37,259.506 166.837,259.973 QU1.27@167.519,259.973
  Bottom Layer w0.229: v1(158.496,257.22) 159.258,256.458 164.465,256.458 v1(165.608,257.601)
GPIO17: QU1.28
GPIO18: QU1.29
GPIO19: QU1.30
GPIO20: QU1.31
GPIO21: QU1.32
GPIO22: JP6.1 QU1.34 | length 37.7
  Top Layer w0.229: JP6.1@135.28,256.712 135.407,256.585 v1(157.861,256.585) ; QU1.34@170.469,258.623 170.469,257.312 v1(170.688,257.093)
  Bottom Layer w0.229: v1(157.861,256.585) 157.988,256.585 158.496,256.077 165.735,256.077 166.751,257.093 v1(170.688,257.093)
GPIO23: QU1.35
GPIO24: QU1.36
GPIO25: QU1.37 R13.1 | length 26.8
  Top Layer w0.229: R13.1@155.144,255.315 157.988,255.315 159.385,253.918 165.1,253.918 165.735,254.553 173.101,254.553 173.355,254.807 173.355,256.712 v1(174.498,257.855) ; QU1.37@171.669,258.623 171.668,257.891 172.085,257.474 v1@172.466,257.474
  Bottom Layer w0.229: v1(172.339,257.474) 172.466,257.347 173.99,257.347 v1(174.498,257.855)
H1_2: H1.2 H5.2 LED4.2 LED25.4 | length 62.8
  Top Layer w1: H1.2@73.279,225.724 70.231,225.724 68.58,227.375 ; LED25.4@83.479,207.841 72.874,207.841 H5.2@72.771,207.944 70.485,207.944 68.58,209.849 68.58,227.375 ; LED4.2@88.479,228.748 85.915,231.312 69.85,231.312 68.58,230.042 68.58,227.375
H7_2: H7.2 H9.2 LED35.2 LED47.4 | length 60.9
  Top Layer w1: H7.2@73.279,190.164 70.358,190.164 69.088,188.894 ; LED47.4@83.987,173.043 H9.2@73.025,173.019 70.739,173.019 69.088,174.67 69.088,188.894 ; LED35.2@88.606,193.061 85.915,195.752 70.993,195.752 69.088,193.847 69.088,188.894
H11_2: H11.2 H13.2 LED57.2 LED69.4 | length 63.6
  Top Layer w1: H11.2@73.152,154.35 70.231,154.35 68.326,152.445 ; LED69.4@83.987,137.737 72.668,137.737 H13.2@72.644,137.713 72.517,137.586 70.104,137.586 68.326,139.364 68.326,152.445 ; LED57.2@88.86,157.374 86.042,160.192 69.977,160.192 68.326,158.541 68.326,152.445
H15_2: H15.2 H17.2 LED79.2 LED91.4 | length 61.4
  Top Layer w1: 69.088,118.79 69.088,123.87 70.866,125.648 87.249,125.648 88.987,123.91 LED79.2@88.987,123.592 ; H15.2@72.898,120.568 70.993,120.568 69.215,118.79 69.215,104.058 70.739,102.534 72.517,102.534 H17.2@72.771,102.28 LED91.4@83.987,102.304
H19_2: H19.2 LED101.2 LED112.4 | length 44.9
  Top Layer w1: LED112.4@70.78,69.92 69.446,69.92 68.961,70.403 68.961,79.928 69.85,80.817 69.85,86.786 ; H19.2@72.771,85.135 71.501,85.135 69.85,86.786 ; LED101.2@88.86,88.159 86.931,90.088 70.866,90.088 69.85,89.072 69.85,86.786
JP1_2: JP1.2 U7.5 | length 4.2
  Top Layer w0.229: JP1.2@118.212,263.697 118.237,263.672 118.237,262.554 118.999,261.792 118.999,260.903 119.38,260.522 U7.5@119.944,260.522
JP2_2: JP2.2 JP12.1 | length 349.1
  Top Layer w0.508: JP12.1@129.134,268.396 129.134,269.056 128.27,269.92 107.315,269.92 102.362,264.967 70.231,264.967 64.262,258.998 64.262,207.309 66.548,205.023 66.548,172.384 64.262,170.098 64.262,100.883 66.294,98.851 66.294,69.387 69.215,66.466 76.581,66.466 79.502,69.387 79.502,74.721 80.772,75.991 121.539,75.991 123.317,74.213 140.97,74.213 142.24,72.943 JP2.2@142.24,72.079
JP3_1: JP3.1 R12.1 | length 8.9
  Top Layer w0.254: R12.1@191.262,259.506 191.262,258.109 192.151,257.22 195.707,257.22 196.342,257.855 JP3.1@196.342,259.608
JP6_2: JP6.2 JP7.2 JP8.2 U7.4 | length 23.8
  Top Layer w0.229: U7.4@119.944,259.872 120.665,259.872 121.539,258.998 121.539,256.61 JP8.2@121.564,256.585
  Top Layer w0.254: JP8.2@121.564,256.585 121.539,256.56 121.539,255.569 122.428,254.68 133.35,254.68 134.468,255.798 JP6.2@134.468,256.712 JP7.2@134.468,260.395
JP9_2: JP9.2 JP13.1 | length 345.7
  Top Layer w0.508: JP13.1@126.213,268.777 125.832,269.158 108.077,269.158 103.124,264.205 72.644,264.205 72.517,264.078 70.612,264.078 65.278,258.744 65.278,207.69 67.437,205.531 67.437,172.003 65.024,169.59 65.024,101.137 67.183,98.978 67.183,69.641 69.596,67.228 75.819,67.228 78.359,69.768 78.359,74.848 80.264,76.753 122.174,76.753 123.952,74.975 143.51,74.975 144.78,73.705 JP9.2@144.78,72.079
JP16_2: JP16.2 JP18.1 | length 178.9
  Top Layer w0.508: JP16.2@188.849,73.222 v1(188.849,74.975) ; v1(189.484,250.235) JP18.1@189.484,251.861
  Bottom Layer w0.508: v1(188.849,74.975) 189.484,75.61 v1(189.484,250.235)
JP17_2: JP17.2 JP19.1 | length 179
  Top Layer w0.508: JP17.2@191.897,73.222 v1(191.897,74.975) ; v1(192.786,250.235) JP19.1@192.786,251.861
  Bottom Layer w0.508: v1(191.897,74.975) 191.897,249.346 v1(192.786,250.235)
LED1_2: LED1.2 LED3.4 | length 12.4
  Top Layer w1: LED1.2@233.259,246.655 239.293,246.654 242.293,243.654 LED3.4@244.388,243.655
LED1_4: LED1.4 LED16.2 | length 11.2
  Top Layer w1: LED16.2@218.273,246.655 220.243,246.654 223.289,243.654 LED1.4@228.259,243.655
LED3_2: H3.2 LED3.2 LED114.4 | length 24.5
  Top Layer w1: LED3.2@249.388,246.655 260.501,246.655 H3.2@260.731,246.425 261.977,246.425 262.485,246.933 LED114.4@262.485,258.022
LED4_4: LED4.4 LED23.2 | length 23.5
  Top Layer w1: LED4.4@83.479,225.748 84.979,227.248 92.456,227.248 95.631,230.423 102.679,230.423 LED23.2@104.354,228.748
LED5_2: LED5.2 LED23.4 | length 24.5
  Top Layer w1: LED23.4@99.354,225.748 100.854,227.248 110.49,227.248 113.665,230.423 119.634,230.423 120.61,229.447 LED5.2@120.61,228.494
LED5_4: LED5.4 LED17.2 | length 24.5
  Top Layer w1: LED5.4@115.61,225.494 116.983,226.867 125.73,226.867 129.032,230.169 136.271,230.169 137.12,229.32 LED17.2@137.12,228.621
LED6_2: LED6.2 LED7.4 | length 24.9
  Top Layer w1: LED7.4@147.995,225.494 149.495,226.994 157.988,226.994 161.925,230.931 168.021,230.931 169.124,229.828 LED6.2@169.124,228.748
LED6_4: LED6.4 LED18.2 | length 24
  Top Layer w1: LED6.4@164.124,225.748 165.496,227.121 175.133,227.121 178.435,230.423 184.15,230.423 185.125,229.448 LED18.2@185.125,228.749
LED7_2: LED7.2 LED17.4 | length 23.8
  Top Layer w1: LED17.4@132.12,225.621 133.366,226.867 141.732,226.867 144.907,230.042 152.273,230.042 152.995,229.32 LED7.2@152.995,228.494
LED8_2: LED8.2 LED9.4 | length 12.3
  Top Layer w1: LED8.2@88.225,246.02 90.956,246.02 93.702,243.274 LED9.4@99.354,243.274
LED9_2: LED9.2 LED10.4 | length 12.1
  Top Layer w1: LED9.2@104.354,246.274 107.085,246.274 109.958,243.401 LED10.4@115.229,243.401
LED10_2: LED10.2 LED11.4 | length 13.1
  Top Layer w1: LED10.2@120.229,246.401 123.723,246.4 126.642,243.527 LED11.4@132.12,243.528
LED11_2: LED11.2 LED12.4 | length 12.5
  Top Layer w1: LED11.2@137.12,246.528 139.852,246.527 143.025,243.4 LED12.4@148.376,243.401
LED12_2: LED12.2 LED15.4 | length 11.7
  Top Layer w1: LED12.2@153.376,246.401 155.726,246.401 158.726,243.401 LED15.4@163.87,243.401
LED13_2: LED13.2 LED16.4 | length 13.6
  Top Layer w1: LED13.2@201.001,246.782 204.113,246.782 207.24,243.655 LED16.4@213.273,243.655
LED13_4: LED13.4 LED14.2 | length 12
  Top Layer w1: LED14.2@185.125,246.529 188.112,246.529 190.906,243.781 LED13.4@196.001,243.782
LED14_4: LED14.4 LED15.2 | length 12.4
  Top Layer w1: LED15.2@168.87,246.401 172.236,246.401 175.109,243.528 LED14.4@180.126,243.528
LED18_4: LED18.4 LED19.2 | length 24
  Top Layer w1: LED18.4@180.126,225.748 181.498,227.121 189.484,227.121 192.405,230.042 200.787,230.042 201.381,229.448 LED19.2@201.381,228.749
LED19_4: LED19.4 LED20.2 | length 23.4
  Top Layer w1: LED19.4@196.382,225.748 197.882,227.248 205.74,227.248 208.788,230.296 214.757,230.296 216.305,228.748 LED20.2@217.257,228.748
LED20_4: LED20.4 LED21.2 | length 23.7
  Top Layer w1: LED20.4@212.257,225.748 213.756,227.248 219.964,227.248 222.885,230.169 232.41,230.169 233.131,229.448 LED21.2@233.131,228.749
LED21_4: LED21.4 LED22.2 | length 24.5
  Top Layer w1: LED21.4@228.132,225.748 229.631,227.248 239.649,227.248 243.078,230.677 247.777,230.677 249.514,228.94 LED22.2@249.514,228.622
LED22_4: H4.2 LED22.4 LED114.2 | length 63.5
  Top Layer w1: LED22.4@244.515,225.621 246.015,227.121 251.46,227.121 252.984,228.645 H4.2@260.985,228.645 263.144,228.645 264.414,229.915 264.414,264.078 262.89,265.602 260.35,265.602 259.486,264.69 LED114.2@259.485,263.022
LED24_2: LED24.2 LED34.4 | length 12.2
  Top Layer w1: LED24.2@233.259,210.714 236.244,210.714 239.117,207.841 LED34.4@244.261,207.841
LED24_4: LED24.4 LED33.2 | length 11.8
  Top Layer w1: LED33.2@217.637,210.588 219.989,210.588 222.91,207.713 LED24.4@228.259,207.714
LED25_2: LED25.2 LED26.4 | length 12.3
  Top Layer w1: LED25.2@88.478,210.842 90.576,210.842 93.751,207.713 LED26.4@99.481,207.714
LED26_2: LED26.2 LED27.4 | length 12.6
  Top Layer w1: LED26.2@104.481,210.714 107.212,210.714 109.958,207.968 LED27.4@115.991,207.968
LED27_2: LED27.2 LED28.4 | length 11.5
  Top Layer w1: LED27.2@120.99,210.969 123.215,210.969 126.263,207.967 LED28.4@131.231,207.968
LED28_2: LED28.2 LED29.4 | length 13
  Top Layer w1: LED28.2@136.23,210.969 138.963,210.969 142.011,207.967 LED29.4@147.995,207.968
LED29_2: LED29.2 LED32.4 | length 12.3
  Top Layer w1: LED29.2@152.994,210.969 155.727,210.969 158.902,207.84 LED32.4@163.997,207.841
LED30_2: LED30.2 LED33.4 | length 13.5
  Top Layer w1: LED30.2@200.492,210.842 203.86,210.842 207.162,207.586 LED33.4@212.638,207.587
LED30_4: LED30.4 LED31.2 | length 11.9
  Top Layer w1: LED31.2@184.872,210.841 187.095,210.841 190.095,207.841 LED30.4@195.493,207.841
LED31_4: LED31.4 LED32.2 | length 12.1
  Top Layer w1: LED32.2@168.996,210.842 171.348,210.842 174.396,207.84 LED31.4@179.872,207.841
LED34_2: H6.2 H8.2 LED34.2 LED44.4 | length 50.9
  Top Layer w1: LED44.4@244.388,190.696 245.761,192.069 252.73,192.069 254.508,193.847 H8.2@260.858,193.847 262.382,193.847 264.287,195.752 264.287,208.706 262.128,210.865 H6.2@260.731,210.865 LED34.2@249.26,210.842
LED35_4: LED35.4 LED45.2 | length 23.5
  Top Layer w1: LED35.4@83.606,190.061 85.233,191.688 91.948,191.688 94.869,194.609 102.806,194.609 LED45.2@104.481,192.934
LED36_2: LED36.2 LED45.4 | length 25
  Top Layer w1: LED45.4@99.481,189.934 101.108,191.561 109.093,191.561 112.522,194.99 120.015,194.99 120.864,194.141 LED36.2@120.864,192.934
LED36_4: LED36.4 LED39.2 | length 23.6
  Top Layer w1: LED36.4@115.864,189.934 117.237,191.307 123.825,191.307 127.762,195.244 134.175,195.244 LED39.2@136.358,193.061
LED37_2: LED37.2 LED38.4 | length 24.3
  Top Layer w1: LED38.4@147.995,190.188 149.368,191.561 156.845,191.561 160.401,195.117 167.767,195.117 168.997,193.887 LED37.2@168.997,193.188
LED37_4: LED37.4 LED40.2 | length 23.7
  Top Layer w1: LED37.4@163.997,190.188 165.497,191.688 173.228,191.688 176.784,195.244 182.689,195.244 LED40.2@184.745,193.188
LED38_2: LED38.2 LED39.4 | length 24.6
  Top Layer w1: LED39.4@131.358,190.061 132.858,191.561 139.954,191.561 143.383,194.99 151.511,194.99 152.995,193.506 LED38.2@152.995,193.188
LED40_4: LED40.4 LED41.2 | length 24.1
  Top Layer w1: LED40.4@179.745,190.188 181.118,191.561 189.484,191.561 193.294,195.371 198.818,195.371 LED41.2@200.874,193.315
LED41_4: LED41.4 LED42.2 | length 25.2
  Top Layer w1: LED41.4@195.874,190.315 197.374,191.815 206.121,191.815 209.804,195.498 216.662,195.498 217.511,194.649 LED42.2@217.511,193.569
LED42_4: LED42.4 LED43.2 | length 24.6
  Top Layer w1: LED42.4@212.511,190.569 214.011,192.069 220.98,192.069 224.79,195.879 232.156,195.879 233.132,194.903 LED43.2@233.132,193.569
LED43_4: LED43.4 LED44.2 | length 24.3
  Top Layer w1: LED43.4@228.132,190.569 229.505,191.942 237.744,191.942 241.554,195.752 247.332,195.752 LED44.2@249.388,193.696
LED46_2: LED46.2 LED56.4 | length 12.5
  Top Layer w1: LED46.2@233.131,176.044 236.626,176.044 239.674,173.042 LED56.4@244.388,173.043
LED46_4: LED46.4 LED55.2 | length 11.9
  Top Layer w1: LED55.2@217.511,176.17 220.369,176.17 223.496,173.043 LED46.4@228.132,173.043
LED47_2: LED47.2 LED48.4 | length 11.7
  Top Layer w1: LED47.2@88.986,176.044 92.1,176.044 95.148,173.042 LED48.4@99.481,173.043
LED48_2: LED48.2 LED49.4 | length 12.4
  Top Layer w1: LED48.2@104.48,176.044 107.594,176.044 110.642,173.042 LED49.4@115.61,173.043
LED49_2: LED49.2 LED50.4 | length 12.1
  Top Layer w1: LED49.2@120.609,176.044 123.215,176.044 126.263,173.042 LED50.4@131.485,173.043
LED50_2: LED50.2 LED51.4 | length 12.7
  Top Layer w1: LED50.2@136.484,176.044 140.233,176.044 143.154,173.169 LED51.4@147.995,173.17
LED51_2: LED51.2 LED54.4 | length 12.2
  Top Layer w1: LED51.2@152.994,176.171 156.235,176.171 159.283,173.169 LED54.4@163.997,173.17
LED52_2: LED52.2 LED55.4 | length 12.7
  Top Layer w1: LED52.2@201.127,176.298 204.622,176.298 207.797,173.169 LED55.4@212.511,173.17
LED52_4: LED52.4 LED53.2 | length 12.6
  Top Layer w1: LED53.2@184.617,176.044 188.112,176.044 190.906,173.296 LED52.4@196.128,173.297
LED53_4: LED53.4 LED54.2 | length 11.9
  Top Layer w1: LED54.2@168.996,176.171 171.983,176.171 175.158,173.042 LED53.4@179.618,173.043
LED56_2: H10.2 H12.2 LED56.2 LED66.4 | length 52.3
  Top Layer w1: LED66.4@244.515,153.993 246.141,155.62 253.492,155.62 255.397,157.525 H12.2@260.858,157.525 262.382,157.525 264.287,159.43 264.287,173.908 262.255,175.94 H10.2@260.858,175.94 249.491,175.94 LED56.2@249.388,176.043
LED57_4: LED57.4 LED67.2 | length 23.6
  Top Layer w1: LED57.4@83.86,154.374 85.36,155.874 93.091,155.874 96.647,159.43 102.362,159.43 104.354,157.438 LED67.2@104.354,157.247
LED58_2: LED58.2 LED67.4 | length 24.2
  Top Layer w1: LED67.4@99.354,154.247 100.99,154.246 102.489,155.747 110.617,155.747 114.173,159.303 118.554,159.303 LED58.2@120.609,157.248
LED58_4: LED58.4 LED61.2 | length 23.9
  Top Layer w1: LED58.4@115.61,154.247 117.11,155.747 125.73,155.747 129.032,159.049 135.001,159.049 136.358,157.692 LED61.2@136.358,157.12
LED59_2: LED59.2 LED60.4 | length 24.7
  Top Layer w1: LED60.4@147.995,154.374 149.495,155.874 156.845,155.874 160.274,159.303 168.148,159.303 169.124,158.327 LED59.2@169.124,157.247
LED59_4: LED59.4 LED62.2 | length 23.7
  Top Layer w1: LED59.4@164.124,154.247 165.878,156.001 173.609,156.001 176.911,159.303 183.515,159.303 184.617,158.201 LED62.2@184.617,157.502
LED60_2: LED60.2 LED61.4 | length 25
  Top Layer w1: LED61.4@131.358,154.12 132.731,155.493 140.716,155.493 144.526,159.303 151.765,159.303 152.995,158.073 LED60.2@152.995,157.374
LED62_4: LED62.4 LED63.2 | length 24.1
  Top Layer w1: LED62.4@179.618,154.501 180.991,155.874 190.119,155.874 193.421,159.176 199.072,159.176 LED63.2@201.001,157.247
LED63_4: LED63.4 LED64.2 | length 24.9
  Top Layer w1: LED63.4@196.042,154.017 197.668,155.643 205.527,155.643 208.829,158.945 216.766,158.945 217.637,158.074 LED64.2@217.637,157.121
LED64_4: LED64.4 LED65.2 | length 24.4
  Top Layer w1: LED64.4@212.679,153.89 214.409,155.62 221.249,155.62 224.958,159.326 231.689,159.326 233.172,157.842 LED65.2@233.172,156.763
LED65_4: LED65.4 LED66.2 | length 25.3
  Top Layer w1: LED65.4@228.132,153.993 229.631,155.493 238.76,155.493 242.697,159.43 248.158,159.43 249.514,158.074 LED66.2@249.514,156.994
LED68_2: LED68.2 LED78.4 | length 12.8
  Top Layer w1: LED68.2@233.005,140.991 235.99,140.991 238.99,137.991 LED78.4@244.515,137.991
LED68_4: LED68.4 LED77.2 | length 11.7
  Top Layer w1: LED77.2@217.51,140.992 219.354,140.992 222.402,137.99 LED68.4@228.005,137.991
LED69_2: LED69.2 LED70.4 | length 11.3
  Top Layer w1: LED69.2@88.987,140.737 90.832,140.737 93.704,137.864 LED70.4@99.1,137.864
LED70_2: LED70.2 LED71.4 | length 12.7
  Top Layer w1: LED70.2@104.1,140.864 107.133,140.864 110.261,137.736 LED71.4@115.483,137.737
LED71_2: LED71.2 LED72.4 | length 12.2
  Top Layer w1: LED71.2@120.482,140.738 123.215,140.738 126.136,137.863 LED72.4@131.485,137.864
LED72_2: LED72.2 LED73.4 | length 12.5
  Top Layer w1: LED72.2@136.485,140.864 139.851,140.864 142.851,137.864 LED73.4@147.741,137.864
LED73_2: LED73.2 LED76.4 | length 12.7
  Top Layer w1: LED73.2@152.741,140.864 155.98,140.864 159.107,137.737 LED76.4@164.124,137.737
LED74_2: LED74.2 LED77.4 | length 12.8
  Top Layer w1: LED74.2@200.873,140.865 204.622,140.865 207.543,137.99 LED77.4@212.511,137.991
LED74_4: LED74.4 LED75.2 | length 12.4
  Top Layer w1: LED75.2@184.617,140.738 187.477,140.738 190.398,137.863 LED74.4@195.874,137.864
LED75_4: LED75.4 LED76.2 | length 11.7
  Top Layer w1: LED76.2@169.123,140.738 171.856,140.738 174.904,137.736 LED75.4@179.618,137.737
LED78_2: H14.2 H16.2 LED78.2 LED88.4 | length 51.4
  Top Layer w1: LED88.4@244.642,119.957 246.269,121.584 253.619,121.584 255.143,123.108 H16.2@260.985,123.108 262.763,123.108 264.033,124.378 264.033,139.364 262.382,141.015 H14.2@260.858,141.015 LED78.2@249.514,140.992
LED79_4: LED79.4 LED89.2 | length 23.1
  Top Layer w1: LED79.4@83.987,120.592 85.487,122.092 92.837,122.092 96.647,125.902 101.663,125.902 LED89.2@103.973,123.592
LED80_2: LED80.2 LED89.4 | length 24.3
  Top Layer w1: LED89.4@98.973,120.592 100.346,121.965 108.839,121.965 112.268,125.394 118.11,125.394 120.039,123.465 LED80.2@120.483,123.465
LED80_4: LED80.4 LED83.2 | length 24.6
  Top Layer w1: LED80.4@115.483,120.465 116.983,121.965 125.222,121.965 128.905,125.648 135.255,125.648 136.485,124.418 LED83.2@136.485,123.465
LED81_2: LED81.2 LED82.4 | length 24.4
  Top Layer w1: LED82.4@147.741,120.465 149.114,121.838 156.083,121.838 159.639,125.394 167.322,125.394 LED81.2@169.251,123.465
LED81_4: LED81.4 LED84.2 | length 23.6
  Top Layer w1: LED81.4@164.251,120.465 165.624,121.838 172.974,121.838 176.784,125.648 183.007,125.648 184.618,124.037 LED84.2@184.618,123.592
LED82_2: LED82.2 LED83.4 | length 25
  Top Layer w1: LED83.4@131.485,120.465 132.858,121.838 141.097,121.838 145.161,125.902 151.13,125.902 152.741,124.291 LED82.2@152.741,123.465
LED84_4: LED84.4 LED85.2 | length 24.3
  Top Layer w1: LED84.4@179.618,120.592 181.118,122.092 189.865,122.092 193.421,125.648 198.564,125.648 LED85.2@200.874,123.338
LED85_4: LED85.4 LED86.2 | length 24.6
  Top Layer w1: LED85.4@195.874,120.338 197.501,121.965 204.47,121.965 207.518,125.013 216.154,125.013 217.511,123.656 LED86.2@217.511,123.211
LED86_4: LED86.4 LED87.2 | length 23.9
  Top Layer w1: LED86.4@212.511,120.211 214.011,121.711 222.123,121.711 225.806,125.394 231.521,125.394 232.878,124.037 LED87.2@232.878,123.211
LED87_4: LED87.4 LED88.2 | length 24.6
  Top Layer w1: LED87.4@227.878,120.211 229.505,121.838 237.617,121.838 240.792,125.013 247.586,125.013 LED88.2@249.642,122.957
LED90_2: LED90.2 LED100.4 | length 12.9
  Top Layer w1: LED90.2@233.004,105.305 236.245,105.305 239.246,102.304 LED100.4@244.642,102.304
LED90_4: LED90.4 LED99.2 | length 11.8
  Top Layer w1: LED99.2@217.51,105.432 219.989,105.432 223.164,102.303 LED90.4@228.005,102.304
LED91_2: LED91.2 LED92.4 | length 11
  Top Layer w1: LED91.2@88.986,105.305 91.211,105.305 94.259,102.303 LED92.4@98.719,102.304
LED92_2: LED92.2 LED93.4 | length 12.8
  Top Layer w1: LED92.2@103.718,105.305 106.832,105.305 109.753,102.43 LED93.4@115.356,102.431
LED93_2: LED93.2 LED94.4 | length 12.4
  Top Layer w1: LED93.2@120.356,105.431 123.087,105.431 126.111,102.407 126.262,102.558 LED94.4@131.485,102.558
LED94_2: LED94.2 LED95.4 | length 12.5
  Top Layer w1: LED94.2@136.484,105.559 139.344,105.559 142.519,102.43 LED95.4@147.741,102.431
LED95_2: LED95.2 LED98.4 | length 12.8
  Top Layer w1: LED95.2@152.741,105.431 155.472,105.431 158.496,102.407 158.647,102.558 LED98.4@164.251,102.558
LED96_2: LED96.2 LED99.4 | length 12.8
  Top Layer w1: LED96.2@201,105.686 203.987,105.686 207.289,102.43 LED99.4@212.511,102.431
LED96_4: LED96.4 LED97.2 | length 12.6
  Top Layer w1: LED97.2@184.49,105.432 188.112,105.432 190.906,102.684 LED96.4@196.001,102.685
LED97_4: LED97.4 LED98.2 | length 11.5
  Top Layer w1: LED98.2@169.251,105.558 171.982,105.558 175.109,102.431 LED97.4@179.491,102.431
LED100_2: H18.2 LED100.2 LED113.4 | length 56.3
  Top Layer w1: LED100.2@249.642,105.304 260.755,105.304 H18.2@260.985,105.074 261.239,104.82 262.763,104.82 266.192,101.391 266.192,72.435 264.795,71.038 260.731,71.038 259.231,69.538 LED113.4@258.231,69.538
LED101_4: LED101.4 LED111.2 | length 23.1
  Top Layer w1: LED101.4@83.86,85.159 85.36,86.659 91.313,86.659 95.25,90.596 101.663,90.596 LED111.2@103.846,88.413
LED102_2: LED102.2 LED111.4 | length 24.3
  Top Layer w1: LED111.4@98.847,85.414 100.345,86.913 110.744,86.913 113.919,90.088 118.681,90.088 LED102.2@120.482,88.287
LED102_4: LED102.4 LED105.2 | length 24
  Top Layer w1: LED102.4@115.483,85.286 116.229,85.286 117.602,86.659 125.476,86.659 129.032,90.215 134.556,90.215 LED105.2@136.612,88.159
LED103_2: LED103.2 LED104.4 | length 24.3
  Top Layer w1: LED104.4@147.995,84.778 149.495,86.278 157.353,86.278 160.909,89.834 167.449,89.834 LED103.2@169.378,87.905
LED103_4: LED103.4 LED106.2 | length 23.1
  Top Layer w1: LED103.4@164.379,84.906 166.004,86.532 174.498,86.532 177.546,89.58 183.134,89.58 184.49,88.224 LED106.2@184.49,87.779
LED104_2: LED104.2 LED105.4 | length 24.4
  Top Layer w1: LED105.4@131.612,85.159 133.112,86.659 140.208,86.659 143.383,89.834 151.384,89.834 152.995,88.223 LED104.2@152.995,87.778
LED106_4: LED106.4 LED107.2 | length 24.5
  Top Layer w1: LED106.4@179.491,84.778 181.118,86.405 190.373,86.405 193.802,89.834 199.136,89.834 200.874,88.096 LED107.2@200.874,87.778
LED107_4: LED107.4 LED108.2 | length 24.9
  Top Layer w1: LED107.4@195.874,84.778 197.374,86.278 207.01,86.278 210.693,89.961 215.9,89.961 217.511,88.35 LED108.2@217.511,87.905
LED108_4: LED108.4 LED109.2 | length 23.3
  Top Layer w1: LED108.4@212.511,84.905 214.011,86.405 222.377,86.405 225.552,89.58 231.521,89.58 232.878,88.223 LED109.2@232.878,87.778
LED109_4: LED109.4 LED110.2 | length 24.7
  Top Layer w1: LED109.4@227.879,84.779 229.377,86.278 239.141,86.278 242.824,89.961 247.777,89.961 249.26,88.478 LED110.2@249.26,87.906
LED110_4: H20.2 LED110.4 LED113.2 | length 35.2
  Top Layer w1: LED110.4@244.261,84.905 245.888,86.532 251.714,86.532 252.476,87.294 H20.2@261.112,87.294 262.636,87.294 264.287,85.643 264.287,73.594 LED113.2@263.231,72.538
LED112_2: LED112.2
MATRIX_DIN: H2.2 LED8.4 LED115.2 | length 33.7
  Top Layer w0.508: v2(67.945,242.996) 67.945,244.647 67.945,257.22 69.747,259.022 LED115.2@71.287,259.022 ; H2.2@73.152,242.869 73.303,243.02 LED8.4@83.225,243.02
  Bottom Layer w0.508: v2(67.945,242.996) 73.025,242.996 H2.2@73.152,242.869
PCF_P4: R24.1 U6.10 U12.4 | length 31.5
  Top Layer w0.229: U6.10@151.868,65.709 152.405,65.709 152.654,65.958 152.654,68.498 153.543,69.387 158.623,69.387 159.004,69.768 v1(159.004,71.673) ; v1(164.592,72.308) 164.592,72.562 165.354,73.324 165.862,73.324 166.096,73.09 U12.4@166.096,72.727 ; v1(170.942,73.705) 171.577,73.705 173.355,71.927 R24.1@173.355,71.292
  Bottom Layer w0.229: v1(159.004,71.673) 163.957,71.673 v1(164.592,72.308) 164.592,72.562 165.735,73.705 v1(170.942,73.705)
QBOOT_1: P3.2 QBOOT.1 | length 5.5
  Top Layer w0.229: QBOOT.1@196.664,264.019 197.3,264.02 198.501,265.221 P3.2@198.485,268.396